# EAGLE board untitled (EAGLE 9.1.3)
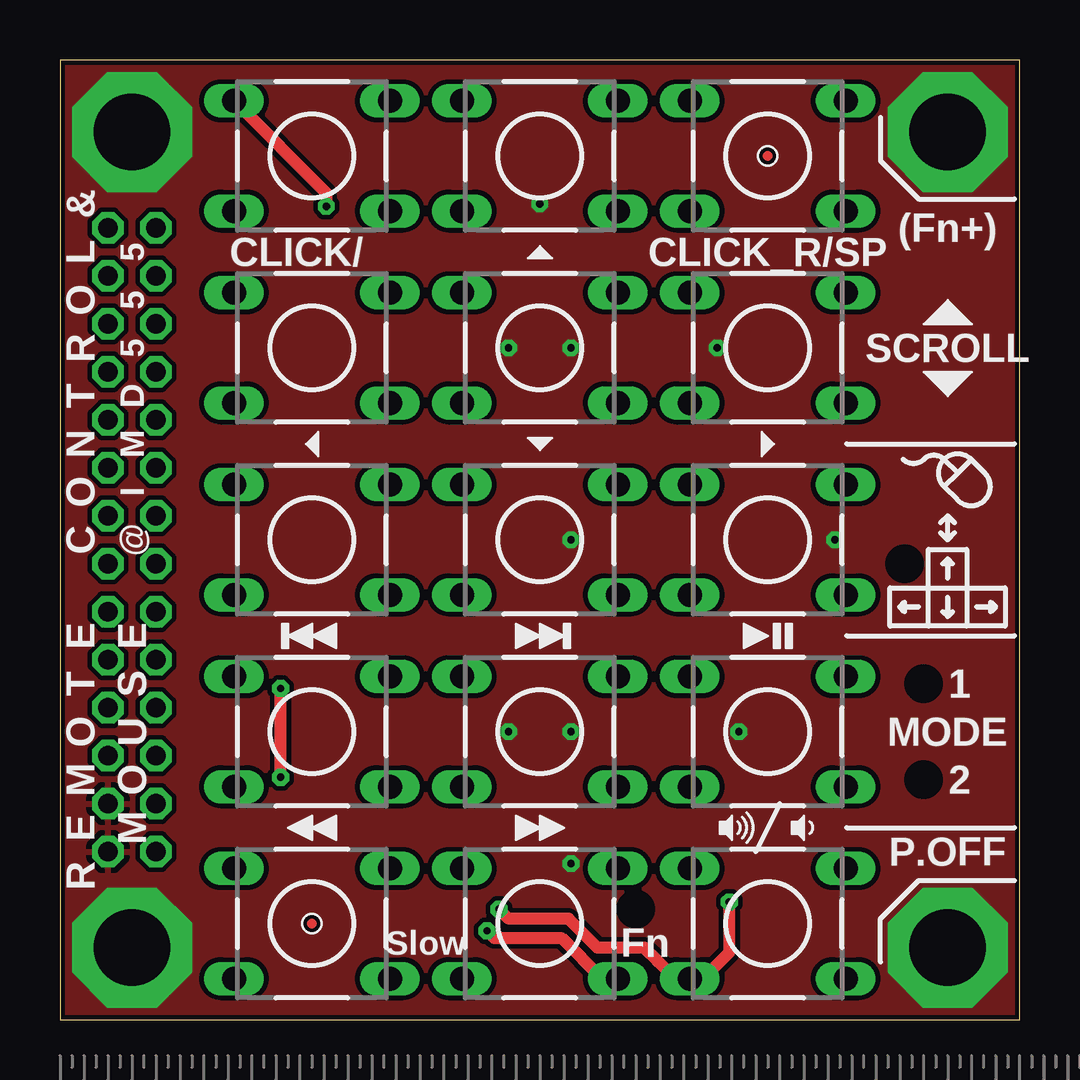
[diagram p0: board, top side]
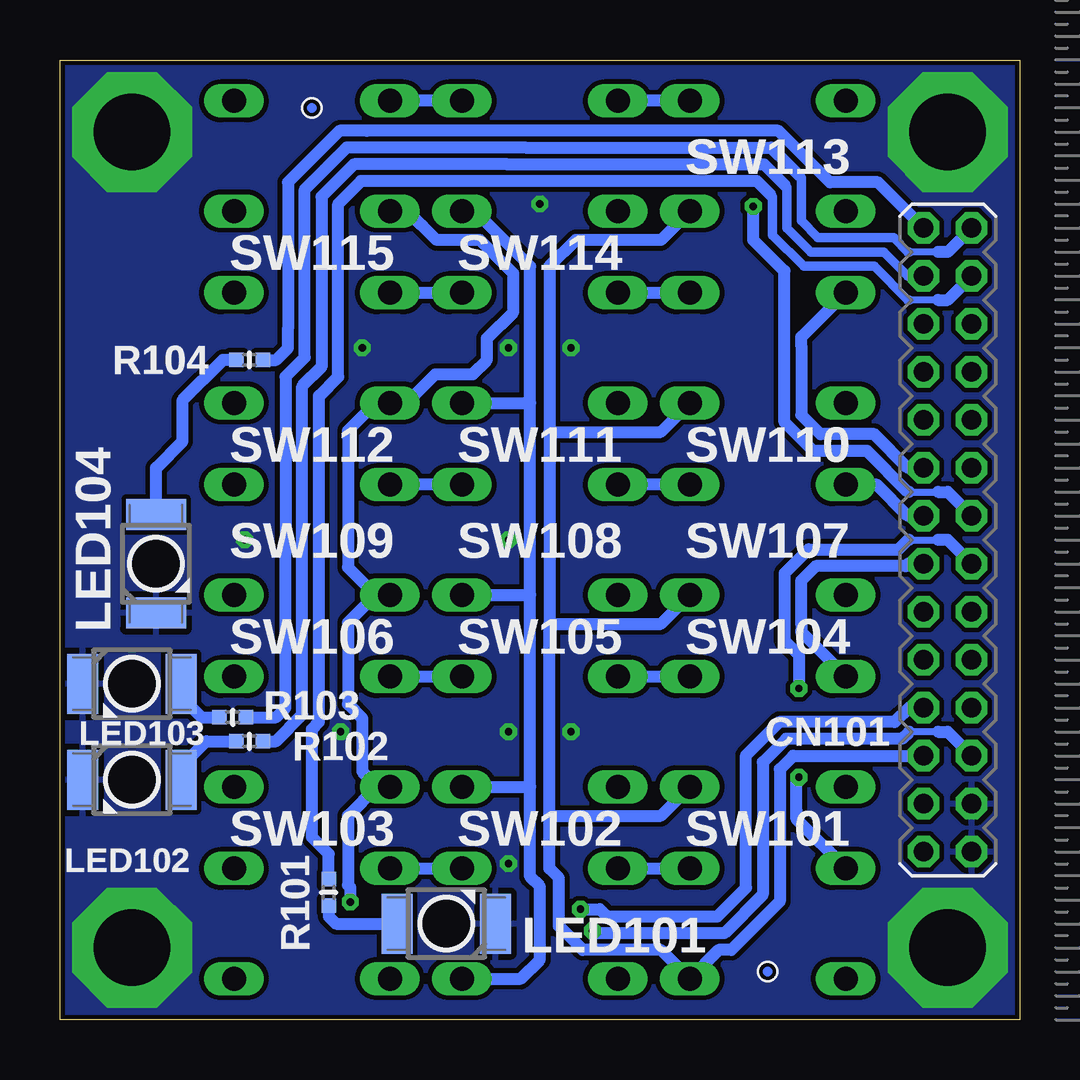
[diagram p1: board, bottom side, seen from below]

Size 40 x 40 mm. Coordinates in mm from the lower left corner, seen from the top.
Outline: 0,0 40,0 40,40 0,40 0,0
Copper layers (1*16): Top 0.035mm / dielectric 1.5mm / Bottom 0.035mm
Design rules "SeeedStudio_2layer_DRU_no_angle_20140221_IMD555 *": minimum track width 0.2mm, minimum drill 0.3mm, track to track 0.2mm, track to pad 0.2mm, pad to pad 0.2mm, via to via 0.2mm, smd to smd 0mil, copper to edge 0.2mm, drill to drill 10mil, minimum pad ring 0.16mm, minimum via ring 0.2mm, stop-mask expansion 0.03mm, vias tented up to drill 5mm, thermal gap 10mil
tRestrict: area 35.2,9.2 to 36.8,10.8; area 35.2,13.2 to 36.8,14.8; area 34.4,18.2 to 36,19.8; area 23.2,3.8 to 24.8,5.4

## Footprints (pad centres in the part's own frame; a part is rotated, then mirrored left to right if it is on the bottom)
2MM_14X2_R = drill 0.8 pad 1.3 octagon: 1 -13,1; 2 -13,-1; 3 -11,1; 4 -11,-1; 5 -9,1; 6 -9,-1; 7 -7,1; 8 -7,-1; 9 -5,1; 10 -5,-1; 11 -3,1; 12 -3,-1; 13 -1,1; 14 -1,-1; 15 1,1; 16 1,-1; 17 3,1; 18 3,-1; 19 5,1; 20 5,-1; 21 7,1; 22 7,-1; 23 9,1; 24 9,-1; 25 11,1; 26 11,-1; 27 13,1; 28 13,-1
P-LCC-2-TOPLED-RG = smd 2.5 x 1.3: A 0,2.05; C 0,-2.05
R0402-SS = smd 0.6 x 0.6: 1 -0.55,0; 2 0.55,0
DTS-6 = drill 1 long: 1 -3.25,2.3; 2 3.25,2.3; 3 -3.25,-2.3; 4 3.25,-2.3

## Placement (x,y rotation side)
CN101  14X2R  [2MM_14X2_R]  3,20 90 bottom
LED101  [P-LCC-2-TOPLED-RG]  23.9,4 90 bottom
LED102  [P-LCC-2-TOPLED-RG]  37,10 270 bottom
LED103  [P-LCC-2-TOPLED-RG]  37,14 270 bottom
LED104  [P-LCC-2-TOPLED-RG]  36,19 0 bottom
R101  [R0402-SS]  28.8,5.3 90 bottom
R102  [R0402-SS]  32.1,11.6 0 bottom
R103  [R0402-SS]  32.8,12.6 0 bottom
R104  [R0402-SS]  32.1,27.5 0 bottom
SW101  DTS-6  [DTS-6]  10.5,4 0 top
SW102  DTS-6  [DTS-6]  20,4 0 top
SW103  DTS-6  [DTS-6]  29.5,4 0 top
SW104  DTS-6  [DTS-6]  10.5,12 0 top
SW105  DTS-6  [DTS-6]  20,12 0 top
SW106  DTS-6  [DTS-6]  29.5,12 0 top
SW107  DTS-6  [DTS-6]  10.5,20 0 top
SW108  DTS-6  [DTS-6]  20,20 0 top
SW109  DTS-6  [DTS-6]  29.5,20 0 top
SW110  DTS-6  [DTS-6]  10.5,28 0 top
SW111  DTS-6  [DTS-6]  20,28 0 top
SW112  DTS-6  [DTS-6]  29.5,28 0 top
SW113  DTS-6  [DTS-6]  10.5,36 0 top
SW114  DTS-6  [DTS-6]  20,36 0 top
SW115  DTS-6  [DTS-6]  29.5,36 0 top
U$1  [PCB_CHECK]  29.5,36 0 top
U$2  [RULER-S]  0,-4.5 0 top  (outside the outline)
U$3  [RULER-S]  -4.5,0 90 bottom  (outside the outline)
U$4  [PCB_CHECK]  10.5,4 0 top
U$6  [PCB_CHECK]  29.5,38 0 bottom
U$7  [PCB_CHECK]  10.5,2 0 bottom

## Library data of the parts
CN101 = 4 _l__l_
LED101-LED104 = 8 LED
R101-R104 = 2 RCL
SW101-SW115 = 3 switch-tact
U$1-U$4 U$6 U$7 = 0 my parts

## Nets
C0: CN101.13 SW104.1
C1: CN101.14 SW101.1
C2: CN101.15 SW107.1
C3: CN101.16 SW113.1
C4: CN101.17 SW110.1
C5: CN101.18
C6: CN101.19
C7: CN101.20
C8: CN101.21
C9: CN101.22
C10: CN101.23
C11: CN101.24
GND: CN101.2 CN101.4 LED101.C LED102.C LED103.C LED104.C
L0: CN101.25 R102.2
L1: CN101.26 R101.2
L2: CN101.27 R104.2
L3: CN101.28 R103.2
N$1: LED104.A R104.1
N$2: SW114.2 SW115.1
N$3: LED103.A R103.1
N$4: SW111.2 SW112.1
N$5: SW108.2 SW109.1
N$6: LED102.A R102.1
N$7: LED101.A R101.1
N$8: SW102.2 SW103.1
N$9: SW105.2 SW106.1
N$11: SW110.2 SW111.1
N$12: SW107.2 SW108.1
N$13: SW104.2 SW105.1
N$14: SW101.2 SW102.1
N$15: SW113.2 SW114.1
R0: CN101.5 SW101.4 SW104.4 SW107.4 SW110.4 SW113.4
R1: CN101.6 SW102.4 SW105.4 SW108.4 SW111.4 SW114.4
R2: CN101.7 SW103.3 SW106.3 SW109.3 SW112.3 SW115.3
R3: CN101.8
R4: CN101.9
R5: CN101.10

## Tracks (layer width: path | path; a pad name or v marks a point on that pad's centre or on a via)
C0
  Bottom 0.5: CN101.13 4.65,19 4.75,18.9 8.5,18.9 9.1,18.3 9.1,16.5 9.1,16.2 9.1,16.15 SW104.1
C1  (via drill 0.3 pad 0.7)
  Top 0.5: v9.2,10.1 v9.2,13.8
  Bottom 0.3: 4.6,20 3.4,20
  Bottom 0.5: 3.4,20 3,20 CN101.14 | 4.6,20 4.65,20 5.05,19.6 8.8,19.6 9.8,18.6 9.8,15.8 9.2,15.2 v9.2,13.8 | SW101.1 9.3,8.35 9.3,8.4 9.3,8.7 9.3,10 v9.2,10.1
C2
  Bottom 0.5: CN101.15 4.65,21 5.95,22.3 SW107.1
C3  (via drill 0.3 pad 0.7)
  Top 0.5: v11.1,33.9 11.1,34.3 11.1,34.4 11.1,34.45 SW113.1
  Bottom 0.3: 4.6,22 3.4,22
  Bottom 0.5: CN101.16 3,22 3.4,22 | 4.6,22 4.65,22 6.35,23.7 8.6,23.7 9.8,24.9 9.8,31.2 11.1,32.5 v11.1,33.9
C4
  Bottom 0.5: CN101.17 4.65,23 6.05,24.4 8.3,24.4 9.1,25.2 9.1,28.1 9.1,28.4 9.1,28.45 SW110.1
GND  (via drill 0.3 pad 0.7, 3.2 pad 5)
  other vias: 3,37 37,37 37,3 3,3 21.3,12 18.7,12 18.7,28 21.3,28 20,34 27.4,28 21.3,20 28.3,12 21.3,6.5 32.3,20
  pour Bottom: 0,40 40,40 40,0 0,0
  pour Top (rank 2): 0,40 40,40 40,0 0,0
L0
  Bottom 0.4: CN101.25 4.65,31 5.65,32 8.7,32 9.7,33 9.7,34.7 9.8,34.8
  Bottom 0.5: 9.8,34.8 10.65,35.65 21.35,35.65 27.75,35.65 29.1,34.3 29.1,27.2 29.9,26.4 29.9,12.7 31,11.6 R102.2
L1
  Bottom 0.3: 3.4,30 4.6,30
  Bottom 0.4: 4.6,30 4.65,30 6.05,31.4 9,31.4 10.3,32.7 10.3,34.3 10.4,34.4
  Bottom 0.5: CN101.26 3,30 3.4,30 | 10.4,34.4 10.95,34.95 27.45,34.95 28.4,34 28.4,26.8 29.2,26 29.2,12.4 29.5,12.1 29.5,7.6 28.8,6.9 R101.2
L2
  Bottom 0.5: CN101.27 5.9,34.9 7.9,34.9 10.05,37.05 27.21,37.05 28.35,37.05 30.5,34.9 30.5,28.8 30.5,28 31,27.5 R104.2
L3
  Bottom 0.3: 3.4,32 4.6,32
  Bottom 0.4: 4.6,32 4.65,32 5.25,32.6 8.4,32.6 9.1,33.3 9.1,35.1 9.2,35.2
  Bottom 0.5: CN101.28 3,32 3.4,32 | 9.2,35.2 10,36 10.01,36 10.36,36.35 20.6,36.35 28.05,36.35 29.8,34.6 29.8,27.6 30.6,26.8 30.6,19.5 30.6,13 31,12.6 R103.2
N$1
  Bottom 0.5: LED104.A 36,23 34.9,24.1 34.9,25.8 33.2,27.5 R104.1
N$2
  Bottom 0.5: SW114.2 SW115.1
N$3
  Bottom 0.5: LED103.A 34.95,13.45 34.1,12.6 R103.1
N$4
  Bottom 0.5: SW112.1 SW111.2
N$5
  Bottom 0.5: SW108.2 SW109.1
N$6
  Bottom 0.5: LED102.A 34.95,10.55 33.9,11.6 R102.1
N$7
  Bottom 0.5: R101.1 28.8,4.3 28.5,4 LED101.A
N$8
  Bottom 0.5: SW103.1 SW102.2
N$9
  Bottom 0.5: SW106.1 SW105.2
N$11
  Bottom 0.5: SW111.1 SW110.2
N$12
  Bottom 0.5: SW107.2 SW108.1
N$13
  Bottom 0.5: SW105.1 SW104.2
N$14
  Bottom 0.5: SW102.1 SW101.2
N$15
  Bottom 0.5: SW113.2 SW114.1
R0
  Bottom 0.5: 19.6,8.5 19.6,16.5 | 19.6,24.5 19.6,16.5 | SW113.4 14.95,32.5 18.5,32.5 19.6,31.4 19.6,24.5 | 19.6,8.5 19.6,6.3 19.2,5.9 19.2,3.9 18.2,2.9 14.95,2.9 SW101.4 12.55,2.9 12.02,2.9 10,4.92 10,10.43 9.43,11 CN101.5 | 19.6,8.5 14.95,8.5 SW104.4 | 19.6,16.5 14.95,16.5 SW107.4 | 19.6,24.5 14.95,24.5 SW110.4
R1  (via drill 0.3 pad 0.7)
  Top 0.5: SW102.4 22.6,1.7 20.9,3.4 18.1,3.4 v17.8,3.7
  Bottom 0.3: 3.4,12 4.6,12
  Bottom 0.5: CN101.6 3,12 3.4,12 | SW114.4 22.7,33.7 20.4,31.4 20.4,25.7 | 20.4,9.7 20.4,5.95 20,5.55 20,2.5 20.8,1.7 SW102.4 | 20.4,9.7 20.4,17.7 | 20.4,17.7 20.4,25.7 | SW105.4 20.4,9.7 | SW108.4 20.4,17.7 | SW111.4 20.4,25.7 | 4.6,12 4.9,11.7 9.72,11.7 10.7,10.72 10.7,5.21 12.31,3.6 17.7,3.6 v17.8,3.7
R2  (via drill 0.3 pad 0.7)
  Top 0.5: 24.93,2.42 25.65,1.7 SW103.3 26.8,1.7 27.9,2.8 v27.9,4.9 | 24.93,2.42 24.35,3 22.4,3 21.2,4.2 18.7,4.2 v18.3,4.6 | 24.93,2.42
  Bottom 0.5: CN101.7 4.6,13 5.2,12.4 10.01,12.4 11.4,11.01 11.4,5.5 12.6,4.3 17.2,4.3 17.5,4.6 v18.3,4.6 | 26.85,17.7 28,18.85 28,24.55 26.85,25.7 SW112.3 25.55,25.7 24.35,26.9 22.8,26.9 22.2,27.5 22.2,28.4 21.1,29.5 21.1,31.1 22.5,32.5 24.3,32.5 24.9,33.1 25.5,33.7 SW115.3 | 26.85,17.7 28,16.55 28,13.15 27.4,12.55 27.4,10.35 26.75,9.7 SW106.3 26.8,9.7 28,8.5 28,5.6 27.9,5.5 v27.9,4.9 | 26.85,17.7 SW109.3

## Text on the board
tPlace: 1 | 2 | 3 | & | (Fn+) | L | 5 | CLICK/↵ | CLICK_R/SP | O | 5 | 5 | R | 5 | SCROLL | 4 | 5 | 6 | T | D | N | M | O | I | C | @ | 7 | 8 | 9 | E | E | T | S | 1 | O | U | MODE | A | B | C | M | O | 2 | E | M | P.OFF | R | Slow | Fn
_bNames: SW113 | SW114 | SW115 | R104 | SW110 | SW111 | SW112 | SW107 | SW108 | SW109 | LED104 | SW104 | SW105 | SW106 | R103 | CN101 | LED103 | R102 | SW101 | SW102 | SW103 | LED102 | R101 | LED101